# Altium PCB RasPiHAT-INPUT.PcbDoc
Units mil, origin at the board's own origin, x right, y up, seen from the top; angles counter-clockwise.
Board outline 2560 x 2205 mil, 2 copper layers (Top, Bottom), stack 61.811 mil thick; 54 components, 47 nets, 206 pads, 21 vias.
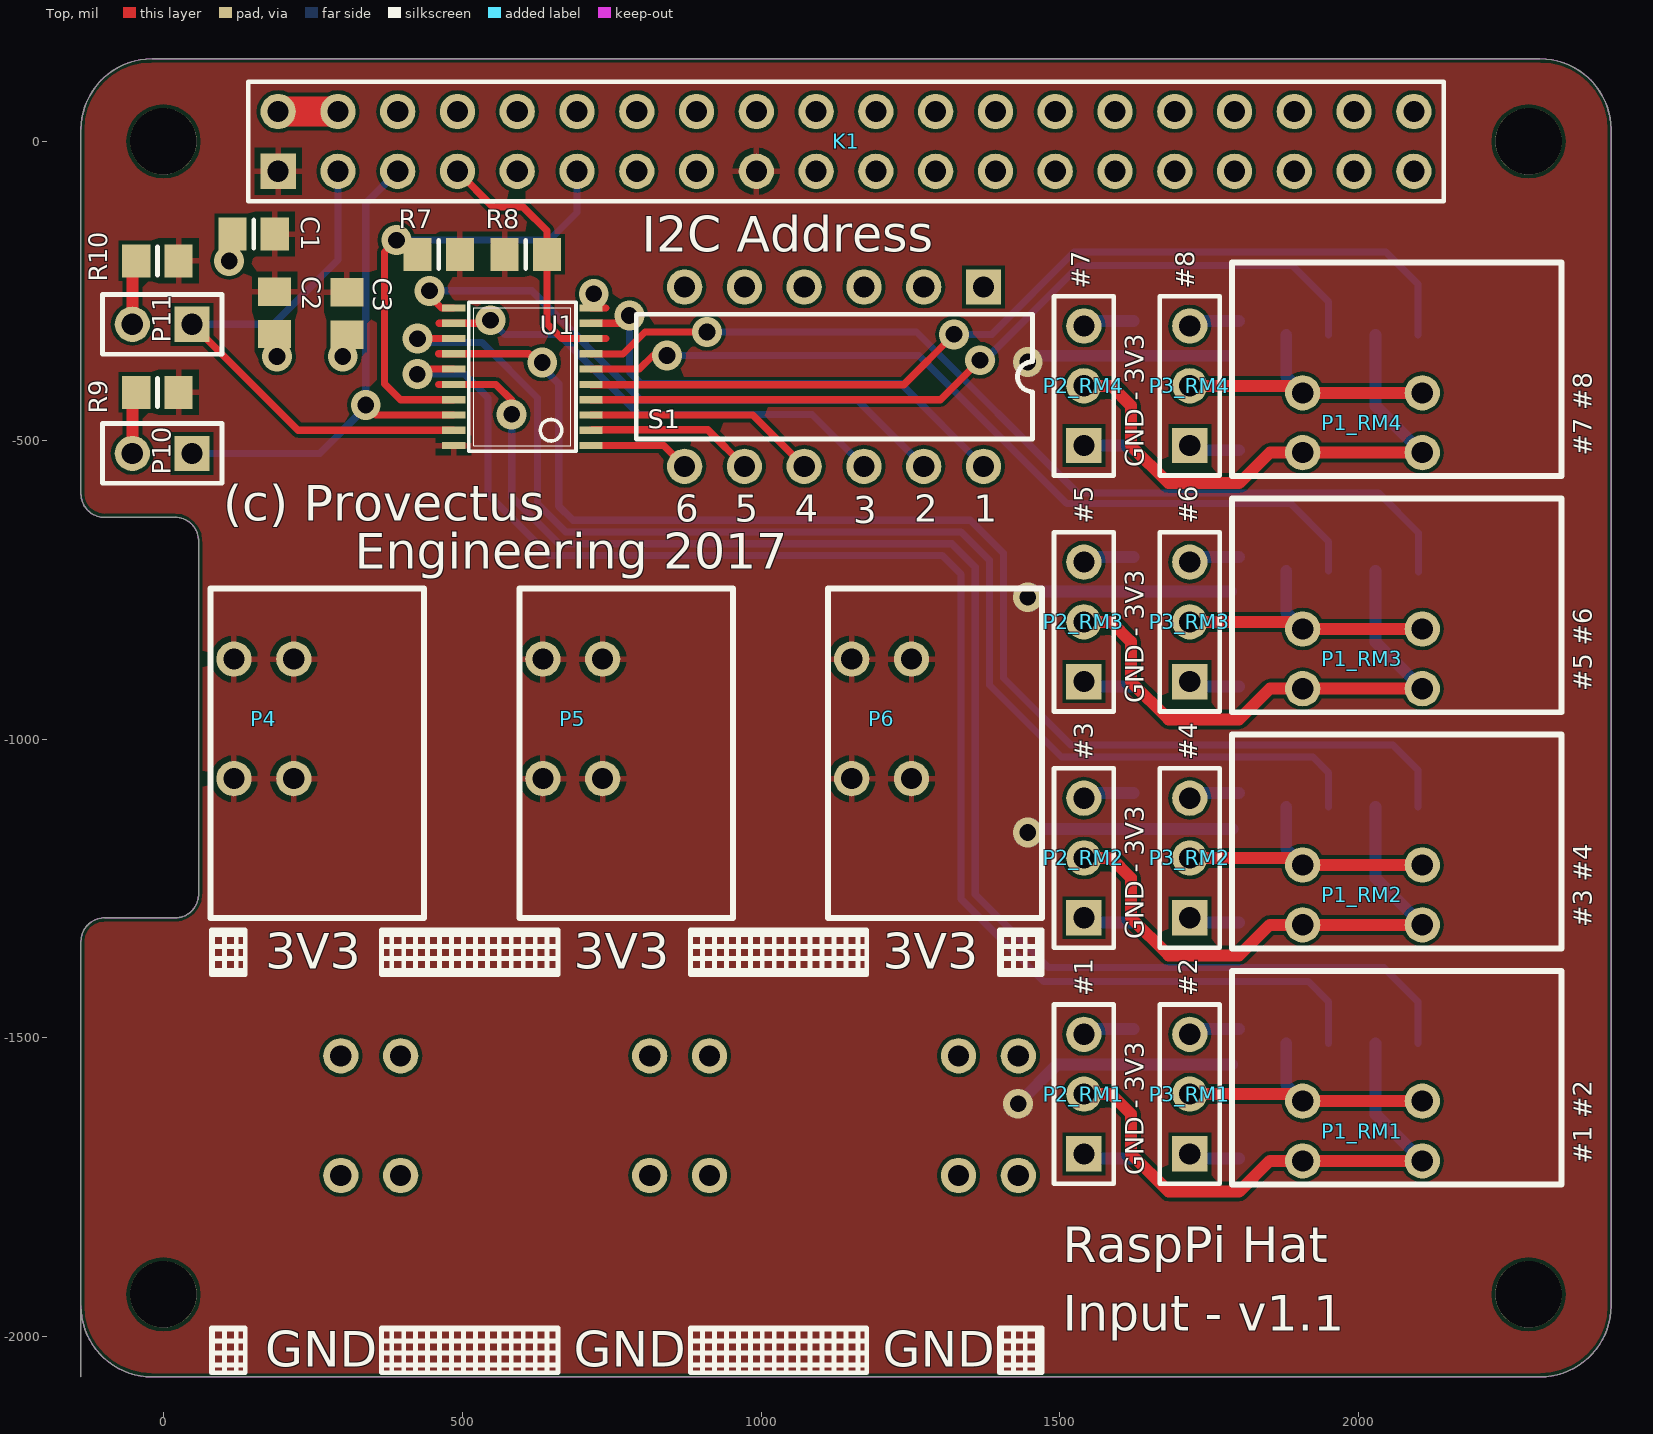
[diagram p0: Top view]
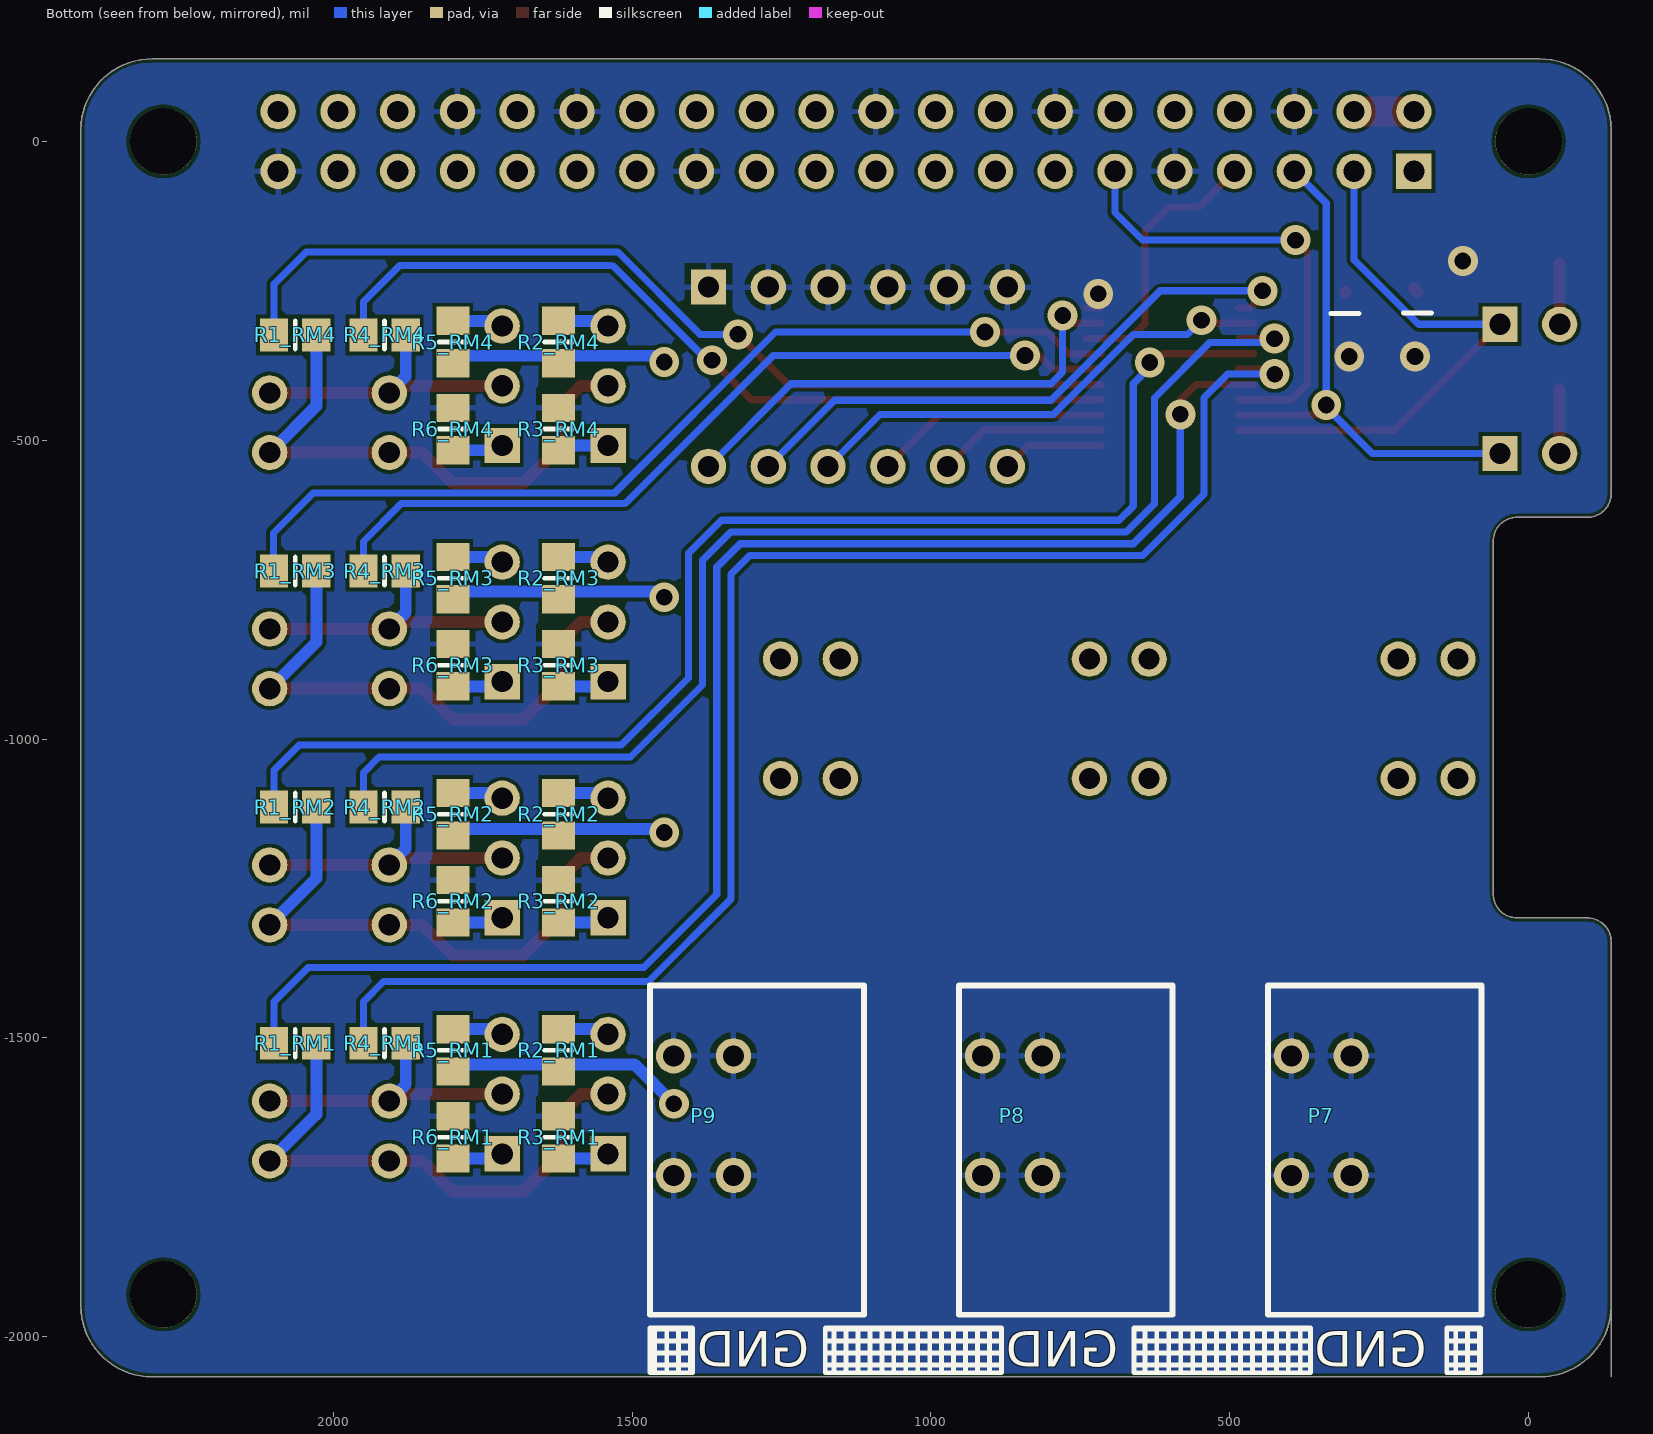
[diagram p1: Bottom view, seen from below]

## Layer stack, top to bottom
Top Solder: solder mask 0.4, Solder Resist, Dk 3.5
Top: signal copper 1.378
Dielectric 1: core 59.0551, FR-4, Dk 4.8
Bottom: signal copper 1.378
Bottom Solder: solder mask 0.4, Solder Resist, Dk 3.5

## Board outline
-138,-1948 ccw(c-19,-1948) -19,-2067 2303,-2067 ccw(c2303,-1948) 2422,-1948 2422,20 ccw(c2303.5,19.5) 2303,138 -19,138 ccw(c-19.5,19.5) -138,20 -138,-590 ccw(c-98.5,-589.5) -98,-629 20,-629 cw(c19.5,-668.5) 59,-669 59,-1259 cw(c19.5,-1259.5) 20,-1299 -98,-1299 ccw(c-98.5,-1338.5) -138,-1338 -138,-2067

## Design rules (kind name [scope] priority, off if disabled: settings)
Clearance mdViaVia [IsVia vs IsVia] p1: gap=6
Clearance mdPadVia [IsPad vs IsVia] p2: gap=6
Clearance mdPadPad [IsPad vs IsPad] p3: gap=6
Clearance mdWireVia [(InLayerClass('Signal Layers') AND IsTrack) vs IsVia] p4: gap=6
Clearance mdWirePad [(InLayerClass('Signal Layers') AND IsTrack) vs IsPad] p5: gap=6
Clearance mdWireWire [(InLayerClass('Signal Layers') AND IsTrack) vs (InLayerClass('Signal Layers') AND IsTrack)] p6: gap=6
Clearance [All] p7: gap=6
HoleSize [All] p1: absolutevalues=TRUE maxlimit=100000 minlimit=12 maxpercent=80.000 minpercent=20.000
HoleToHoleClearance [All] p1: gap=8 allowstackedmicrovias=TRUE
PolygonConnect ThermalVias [IsVia] p1: connectstyle=Direct reliefconductorwidth=10 reliefentries=4 polygonreliefangle="90 Angle" airgapwidth=10
PolygonConnect [All] p2: connectstyle=Relief reliefconductorwidth=10 reliefentries=4 polygonreliefangle="90 Angle" airgapwidth=10
RoomDefinition RM4 [InComponentClass('RM4')] p1: confinementstyle=ConfineIn formatcopy=TRUE lockcomponents=FALSE outline 2350.98,-585 2350.98,-193.9 1475,-193.9 1475,-585
RoomDefinition RM3 [InComponentClass('RM3')] p2: confinementstyle=ConfineIn formatcopy=TRUE lockcomponents=FALSE outline 2350.98,-980 2350.98,-588.9 1475,-588.9 1475,-980
RoomDefinition RM2 [InComponentClass('RM2')] p3: confinementstyle=ConfineIn formatcopy=TRUE lockcomponents=FALSE outline 2350.98,-1375 2350.98,-983.9 1475,-983.9 1475,-1375
RoomDefinition RM1 [InComponentClass('RM1')] p4: confinementstyle=ConfineIn formatcopy=TRUE lockcomponents=FALSE outline 2350.98,-1770 2350.98,-1378.9 1475,-1378.9 1475,-1770
RoomDefinition RasPiHAT-INPUT [InComponentClass('RasPiHAT-INPUT')] p5: confinementstyle=ConfineIn formatcopy=TRUE lockcomponents=FALSE outline 2460,175 -185,175 -185,-2067 2460,-2067
RoutingVias [All] p1: holewidth=28 width=50 viastyle="Through Hole" minholewidth=28 minwidth=50 maxholewidth=28 maxwidth=50
SilkToSilkClearance [All] p1 off: silktosilkclearance=10
SilkToSolderMaskClearance [IsPad] p1 off: minsilkscreentomaskgap=10 clearancetoexposedcopper=TRUE
SolderMaskExpansion [All] p1: expansion=2
Width [All] p1: maxlimit=100000 minlimit=6 preferedwidth=10
26 further rules are at their usual default settings.

## Classes and differential pairs
channel class Input: RM1 RM2 RM3 RM4
component class RM1: P1_RM1 P2_RM1 P3_RM1 R1_RM1 R2_RM1 R3_RM1 R4_RM1 R5_RM1 R6_RM1
component class RM2: P1_RM2 P2_RM2 P3_RM2 R1_RM2 R2_RM2 R3_RM2 R4_RM2 R5_RM2 R6_RM2
component class RM3: P1_RM3 P2_RM3 P3_RM3 R1_RM3 R2_RM3 R3_RM3 R4_RM3 R5_RM3 R6_RM3
component class RM4: P1_RM4 P2_RM4 P3_RM4 R1_RM4 R2_RM4 R3_RM4 R4_RM4 R5_RM4 R6_RM4
component class RasPiHAT-INPUT: C1 C2 C3 J1 K1 P4 P5 P6 P7 P8 P9 P10 P11 R7 R8 R9 R10 S1 U1

## Components (designator, comment, footprint, x,y, rotation, side; value= is the part's Value field where it differs from the comment)
C1 "Cap" 6-0805_N#1 150.94,-155 r0 top
C2 "Cap" 6-0805_N#2 186,-287 r270 top
C3 "Cap" 6-0805_N#2 307,-288 r270 top
K1 "PIN20X2" HDR2X20 192,-50 r0 top
P1_RM1 "Header 2" "2 PIN TERM BLK" 1906.1,-1705.67 r90 top (schematic designator P1)
P1_RM2 "Header 2" "2 PIN TERM BLK" 1906.1,-1310.67 r90 top (schematic designator P1)
P1_RM3 "Header 2" "2 PIN TERM BLK" 1906.1,-915.67 r90 top (schematic designator P1)
P1_RM4 "Header 2" "2 PIN TERM BLK" 1906.1,-520.67 r90 top (schematic designator P1)
P2_RM1 "Header 3" HDR1X3 1539.96,-1693.86 r90 top (schematic designator P2)
P2_RM2 "Header 3" HDR1X3 1539.96,-1298.86 r90 top (schematic designator P2)
P2_RM3 "Header 3" HDR1X3 1539.96,-903.86 r90 top (schematic designator P2)
P2_RM4 "Header 3" HDR1X3 1539.96,-508.86 r90 top (schematic designator P2)
P3_RM1 "Header 3" HDR1X3 1717.13,-1693.86 r90 top (schematic designator P3)
P3_RM2 "Header 3" HDR1X3 1717.13,-1298.86 r90 top (schematic designator P3)
P3_RM3 "Header 3" HDR1X3 1717.13,-903.86 r90 top (schematic designator P3)
P3_RM4 "Header 3" HDR1X3 1717.13,-508.86 r90 top (schematic designator P3)
P4 "Header 2" "2 PIN TERM BLK" 118.11,-866.14 r0 top
P5 "Header 2" "2 PIN TERM BLK" 634.84,-866.14 r0 top
P6 "Header 2" "2 PIN TERM BLK" 1151.57,-866.14 r0 top
P7 "Header 2" "2 PIN TERM BLK" 396.85,-1529.96 r180 bottom
P8 "Header 2" "2 PIN TERM BLK" 913.58,-1529.96 r180 bottom
P9 "Header 2" "2 PIN TERM BLK" 1430.31,-1529.96 r180 bottom
P10 "Header 2" HDR1X2 48,-522 r180 top
P11 "Header 2" HDR1X2 48,-306 r180 top
R1_RM1 "Res1" 6-0805_N#1 2063.58,-1508.82 r180 bottom (schematic designator R1)
R1_RM2 "Res1" 6-0805_N#1 2063.58,-1113.82 r180 bottom (schematic designator R1)
R1_RM3 "Res1" 6-0805_N#1 2063.58,-718.82 r180 bottom (schematic designator R1)
R1_RM4 "Res1" 6-0805_N#1 2063.58,-323.82 r180 bottom (schematic designator R1)
R2_RM1 "Res1" 6-0805_N#1 1622.64,-1520.63 r90 bottom (schematic designator R2)
R2_RM2 "Res1" 6-0805_N#1 1622.64,-1125.63 r90 bottom (schematic designator R2)
R2_RM3 "Res1" 6-0805_N#1 1622.64,-730.63 r90 bottom (schematic designator R2)
R2_RM4 "Res1" 6-0805_N#1 1622.64,-335.63 r90 bottom (schematic designator R2)
R3_RM1 "Res1" 6-0805_N#1 1622.64,-1666.3 r90 bottom (schematic designator R3)
R3_RM2 "Res1" 6-0805_N#1 1622.64,-1271.3 r90 bottom (schematic designator R3)
R3_RM3 "Res1" 6-0805_N#1 1622.64,-876.3 r90 bottom (schematic designator R3)
R3_RM4 "Res1" 6-0805_N#1 1622.64,-481.3 r90 bottom (schematic designator R3)
R4_RM1 "Res1" 6-0805_N#1 1913.98,-1508.82 r180 bottom (schematic designator R4)
R4_RM2 "Res1" 6-0805_N#1 1913.98,-1113.82 r180 bottom (schematic designator R4)
R4_RM3 "Res1" 6-0805_N#1 1913.98,-718.82 r180 bottom (schematic designator R4)
R4_RM4 "Res1" 6-0805_N#1 1913.98,-323.82 r180 bottom (schematic designator R4)
R5_RM1 "Res1" 6-0805_N#1 1799.8,-1520.63 r90 bottom (schematic designator R5)
R5_RM2 "Res1" 6-0805_N#1 1799.8,-1125.63 r90 bottom (schematic designator R5)
R5_RM3 "Res1" 6-0805_N#1 1799.8,-730.63 r90 bottom (schematic designator R5)
R5_RM4 "Res1" 6-0805_N#1 1799.8,-335.63 r90 bottom (schematic designator R5)
R6_RM1 "Res1" 6-0805_N#1 1799.8,-1666.3 r90 bottom (schematic designator R6)
R6_RM2 "Res1" 6-0805_N#1 1799.8,-1271.3 r90 bottom (schematic designator R6)
R6_RM3 "Res1" 6-0805_N#1 1799.8,-876.3 r90 bottom (schematic designator R6)
R6_RM4 "Res1" 6-0805_N#1 1799.8,-481.3 r90 bottom (schematic designator R6)
R7 "Res1" 6-0805_N#1 460.63,-188.98 r180 top
R8 "Res1" 6-0805_N#1 606.3,-188.98 r0 top
R9 "Res1" 6-0805_N#1 -10,-420 r180 top
R10 "Res1" 6-0805_N#1 -10,-200 r180 top
S1 "SW DIP-6" DIP-12/SW 1122.05,-393.7 r180 top
U1 "PCA9501" TSSOP20 600.39,-393.7 r90 top

## Footprints (in the part's own frame and the unit in brackets; to place one, negate y for a bottom-side part, rotate by r counter-clockwise, add the part's x,y. Pads: shape width x height; smd on the part's side, far side on the other; paste and mask are expansions set on the pad)
"2 PIN TERM BLK" [mm] "2 Poles/2 Pin 2.54mm/0.1\" PCB Universal Screw Terminal Block Connector"
  round 1.5 hole 0.9: 1(0,0) 1(0,-5.08) 2(2.54,0) 2(2.54,-5.08)
  silkscreen extent -1,-11 8.08,3, body extent -1,-11 8,3, height 8
6-0805_N#1 [mm] "Chip Resistor, Body 2.0x1.2mm, IPC Medium Density"
  rect 1.2x1.4 smd: 1(-0.9,0) 2(0.9,0)
  silkscreen extent 0,-0.6 0,0.6, body extent -1.07,-0.7 1.07,0.7, height 0.7
6-0805_N#2 [mm] "Chip Resistor, Body 2.0x1.2mm, IPC Medium Density"
  rect 1.2x1.4 smd: 1(0.9,0) 2(-0.9,0)
  body extent -1.07,-0.7 1.07,0.7, height 0.7
DIP-12/SW [mm] "DIP Switch; 12 Leads"
  rect 1.5x1.5 hole 0.9: 1(-6.35,-3.81)
  round 1.5 hole 0.9: 2(-3.81,-3.81) 3(-1.27,-3.81) 4(1.27,-3.81) 5(3.81,-3.81) 6(6.35,-3.81) 7(6.35,3.81) 8(3.81,3.81) 9(1.27,3.81) 10(-1.27,3.81) 11(-3.81,3.81) 12(-6.35,3.81)
  silkscreen extent -8.43,-2.65 8.41,2.65
HDR1X2 [mm] "Connector; Header; 2 Position"
  rect 1.5x1.5 hole 0.9: 1(0,0)
  round 1.5 hole 0.9: 2(2.54,0)
  silkscreen extent -1.27,-1.27 3.81,1.27
HDR1X3 [mm] "Connector; Header; 3 Position"
  rect 1.5x1.5 hole 0.9: 1(0,0)
  round 1.5 hole 0.9: 2(2.54,0) 3(5.08,0)
  silkscreen extent -1.27,-1.27 6.35,1.27
HDR2X20 [mm] "Connector; Header; 20x2 Position"
  rect 1.5x1.5 hole 0.9: 1(0,0)
  round 1.5 hole 0.9: 2(0,2.54) 3(2.54,0) 4(2.54,2.54) 5(5.08,0) 6(5.08,2.54) 7(7.62,0) 8(7.62,2.54) 9(10.16,0) 10(10.16,2.54) 11(12.7,0) 12(12.7,2.54) 13(15.24,0) 14(15.24,2.54) 15(17.78,0) 16(17.78,2.54) 17(20.32,0) 18(20.32,2.54) 19(22.86,0) 20(22.86,2.54) 21(25.4,0) 22(25.4,2.54) 23(27.94,0) 24(27.94,2.54) 25(30.48,0) 26(30.48,2.54) 27(33.02,0) 28(33.02,2.54) 29(35.56,0) 30(35.56,2.54) 31(38.1,0) 32(38.1,2.54) 33(40.64,0) 34(40.64,2.54) 35(43.18,0) 36(43.18,2.54) 37(45.72,0) 38(45.72,2.54) 39(48.26,0) 40(48.26,2.54)
  silkscreen extent -1.27,-1.27 49.53,3.81
TSSOP20 [mil]
  rect 12x39 smd paste-1000 mask-1000: 1(-115.16,-114.87) 2(-89.57,-114.87) 3(-63.98,-114.87) 4(-38.39,-114.87) 5(-12.8,-114.87) 6(12.8,-114.87) 7(38.39,-114.87) 8(63.98,-114.87) 9(89.57,-114.87) 10(115.16,-114.87) 11(115.16,114.87) 12(89.57,114.87) 13(63.98,114.87) 14(38.39,114.87) 15(12.8,114.87) 16(-12.8,114.87) 17(-38.39,114.87) 18(-63.98,114.87) 19(-89.57,114.87) 20(-115.16,114.87)
  silkscreen extent -125,-90 125,90

## Part data
C1 C2 C3: "Capacitor"
P1_RM1 P1_RM2 P1_RM3 P1_RM4 P4 P5 P6 P7 P8 P9 P10 P11: "Header, 2-Pin"
P2_RM1 P2_RM2 P2_RM3 P2_RM4 P3_RM1 P3_RM2 P3_RM3 P3_RM4: "Header, 3-Pin"
R1_RM1 R1_RM2 R1_RM3 R1_RM4 R2_RM1 R2_RM2 R2_RM3 R2_RM4 R3_RM1 R3_RM2 R3_RM3 R3_RM4 R4_RM1 R4_RM2 R4_RM3 R4_RM4 R5_RM1 R5_RM2 R5_RM3 R5_RM4 R6_RM1 R6_RM2 R6_RM3 R6_RM4 R7 R8 R9 R10: "Resistor"
S1: "DIP Switch, 6 Position, SPST"

## Free pads (board coordinates)
  round 111 hole 111: 1(0,-1929) 1(0,0) 1(2284,-1929) 1(2284,0)

## Via types
v1: diameter 50, hole 28, Top to Bottom, 21 vias

## Nets (pads, with @x,y where several pads share a name; then routed paths per layer and width w, separated by ;. In a path a pad name is that pad's centre, name@x,y a point inside that pad or via, vN(x,y) a via of type N, cw(c..) or ccw(c..) an arc to the next point about the centre after c; other vN are vias at no path point)
+3V3: C1.2 C2.2 C3.2 K1.1 K1.17 P4.1 P4.2 P5.1 P5.2 P6.1 P6.2 R2_RM1.1 R2_RM2.1 R2_RM3.1 R2_RM4.1 R5_RM1.1 R5_RM2.1 R5_RM3.1 R5_RM4.1 R7.1 R8.1 R9.1 R10.1 U1.20 | length 1424.4
  Top w20: C2.2 C2.2@192,-245.57 ; C3.2@306,-251.57 C3.2
  Bottom w20: v1(1430,-1610) 1495.65,-1544.35 R5_RM1.1@1788.09,-1544.35 ; v1(1446.08,-1156.28) 1452.32,-1150.05 R5_RM2.1@1788.79,-1150.05 ; v1(1446.08,-762.58) 1455.91,-752.75 R5_RM3.1@1786.49,-752.75 ; v1(1446.08,-368.88) 1456.37,-358.59 R5_RM4.1@1781.23,-358.59
+5V: K1.2 K1.4 | length 100
  Top w50: K1.2 K1.4
EEPROM_WC: K1.11 R7.2 U1.17 | length 765.2
  Top w12: v1(390,-165.2) 370.08,-185.12 370.08,-405.51 396.65,-432.09 U1.17
  Bottom w12: v1(390,-165.2) 645.83,-165.2 692,-119.02 K1.11
GND: C1.1 C2.1 C3.1 K1.6 K1.9 K1.14 K1.20 K1.25 K1.30 K1.34 K1.39 P7.1 P7.2 P8.1 P8.2 P9.1 P9.2 R3_RM1.2 R3_RM2.2 R3_RM3.2 R3_RM4.2 R6_RM1.2 R6_RM2.2 R6_RM3.2 R6_RM4.2 S1.1 S1.2 S1.3 S1.4 S1.5 S1.6 U1.10 | length 24.7
  Top w12: U1.10 740,-278.54
  other v1: 190,-360 300,-360 720,-255 110,-200
INTERRUPT: K1.7 R8.2 U1.8 | length 455
  Top w12: K1.7 552,-110 602.13,-110 641.73,-149.61 R8.2 641.73,-305.12 666.34,-329.72 U1.8 740,-329.72
NetP1_RM1_1: P1_RM1.1 P2_RM1.2 R1_RM1.2 | length 923.2
  Top w20: P2_RM1.2 1585.63,-1593.86 1618.7,-1626.93 1618.7,-1693.86 1681.69,-1756.85 1799.8,-1756.85 1850.98,-1705.67 1906.1,-1705.67 P1_RM1.1@2106.1,-1705.67
  Bottom w20: R1_RM1.2 2028.15,-1627.72 P1_RM1.1@2106.1,-1705.67
NetP1_RM1_2: P1_RM1.2 P3_RM1.2 R4_RM1.2 | length 502.1
  Top w20: P3_RM1.2 1894.29,-1593.86 1906.1,-1605.67 P1_RM1.2@2106.1,-1605.67
  Bottom w20: R4_RM1.2 1878.54,-1578.11 P1_RM1.2@1906.1,-1605.67
NetP1_RM2_1: P1_RM2.1 P2_RM2.2 R1_RM2.2 | length 923.2
  Top w20: P2_RM2.2 1585.63,-1198.86 1618.7,-1231.93 1618.7,-1298.86 1681.69,-1361.85 1799.8,-1361.85 1850.98,-1310.67 1906.1,-1310.67 P1_RM2.1@2106.1,-1310.67
  Bottom w20: R1_RM2.2 2028.15,-1232.72 P1_RM2.1@2106.1,-1310.67
NetP1_RM2_2: P1_RM2.2 P3_RM2.2 R4_RM2.2 | length 502.1
  Top w20: P3_RM2.2 1894.29,-1198.86 1906.1,-1210.67 P1_RM2.2@2106.1,-1210.67
  Bottom w20: R4_RM2.2 1878.54,-1183.11 P1_RM2.2@1906.1,-1210.67
NetP1_RM3_1: P1_RM3.1 P2_RM3.2 R1_RM3.2 | length 923.2
  Top w20: P2_RM3.2 1585.63,-803.86 1618.7,-836.93 1618.7,-903.86 1681.69,-966.85 1799.8,-966.85 1850.98,-915.67 1906.1,-915.67 P1_RM3.1@2106.1,-915.67
  Bottom w20: R1_RM3.2 2028.15,-837.72 P1_RM3.1@2106.1,-915.67
NetP1_RM3_2: P1_RM3.2 P3_RM3.2 R4_RM3.2 | length 502.1
  Top w20: P3_RM3.2 1894.29,-803.86 1906.1,-815.67 P1_RM3.2@2106.1,-815.67
  Bottom w20: R4_RM3.2 1878.54,-788.11 P1_RM3.2@1906.1,-815.67
NetP1_RM4_1: P1_RM4.1 P2_RM4.2 R1_RM4.2 | length 923.2
  Top w20: P2_RM4.2 1585.63,-408.86 1618.7,-441.93 1618.7,-508.86 1681.69,-571.85 1799.8,-571.85 1850.98,-520.67 1906.1,-520.67 P1_RM4.1@2106.1,-520.67
  Bottom w20: R1_RM4.2 2028.15,-442.72 P1_RM4.1@2106.1,-520.67
NetP1_RM4_2: P1_RM4.2 P3_RM4.2 R4_RM4.2 | length 502.1
  Top w20: P3_RM4.2 1894.29,-408.86 1906.1,-420.67 P1_RM4.2@2106.1,-420.67
  Bottom w20: R4_RM4.2 1878.54,-393.11 P1_RM4.2@1906.1,-420.67
NetP2_RM1_1: P2_RM1.1 R3_RM1.1 | length 85.9
  Bottom w20: P2_RM1.1 1547.83,-1701.73 R3_RM1.1
NetP2_RM1_3: P2_RM1.3 R2_RM1.2 | length 86.3
  Bottom w20: P2_RM1.3 1548.62,-1485.2 R2_RM1.2
NetP2_RM2_1: P2_RM2.1 R3_RM2.1 | length 85.9
  Bottom w20: P2_RM2.1 1547.83,-1306.73 R3_RM2.1
NetP2_RM2_3: P2_RM2.3 R2_RM2.2 | length 86.3
  Bottom w20: P2_RM2.3 1548.62,-1090.2 R2_RM2.2
NetP2_RM3_1: P2_RM3.1 R3_RM3.1 | length 85.9
  Bottom w20: P2_RM3.1 1547.83,-911.73 R3_RM3.1
NetP2_RM3_3: P2_RM3.3 R2_RM3.2 | length 86.3
  Bottom w20: P2_RM3.3 1548.62,-695.2 R2_RM3.2
NetP2_RM4_1: P2_RM4.1 R3_RM4.1 | length 97.1
  Bottom w20: P2_RM4.1@1547.83,-516.73 P2_RM4.1 1614.76,-508.86 R3_RM4.1
NetP2_RM4_3: P2_RM4.3 R2_RM4.2 | length 86.3
  Bottom w20: P2_RM4.3 1548.62,-300.2 R2_RM4.2
NetP3_RM1_1: P3_RM1.1 R6_RM1.1 | length 85.9
  Bottom w20: P3_RM1.1 1725,-1701.73 R6_RM1.1
NetP3_RM1_3: P3_RM1.3 R5_RM1.2 | length 86.3
  Bottom w20: P3_RM1.3 1725.79,-1485.2 R5_RM1.2
NetP3_RM2_1: P3_RM2.1 R6_RM2.1 | length 85.9
  Bottom w20: P3_RM2.1 1725,-1306.73 R6_RM2.1
NetP3_RM2_3: P3_RM2.3 R5_RM2.2 | length 86.3
  Bottom w20: P3_RM2.3 1725.79,-1090.2 R5_RM2.2
NetP3_RM3_1: P3_RM3.1 R6_RM3.1 | length 85.9
  Bottom w20: P3_RM3.1 1725,-911.73 R6_RM3.1
NetP3_RM3_3: P3_RM3.3 R5_RM3.2 | length 86.3
  Bottom w20: P3_RM3.3 1725.79,-695.2 R5_RM3.2
NetP3_RM4_1: P3_RM4.1 R6_RM4.1 | length 85.9
  Bottom w20: P3_RM4.1 1725,-516.73 R6_RM4.1
NetP3_RM4_3: P3_RM4.3 R5_RM4.2 | length 86.3
  Bottom w20: P3_RM4.3 1725.79,-300.2 R5_RM4.2
NetP10_2: P10.2 R9.2 | length 107.2
  Top w20: P10.2 -51.43,-521.43 R9.2@-51.43,-415
NetP11_2: P11.2 R10.2 | length 102.2
  Top w20: P11.2 -51.43,-305.43 R10.2@-51.43,-204
NetR1_RM1_1: R1_RM1.1 U1.16 | length 2551.5
  Top w12: 460,-406.5 U1.16 556.1,-406.5 582.68,-433.07 v1(582.68,-456.69)
  Bottom w12: v1(582.68,-456.69) 582.68,-594.49 661.42,-673.23 1318.9,-673.23 1358.27,-712.6 1358.27,-1259.84 1480.32,-1381.89 2041.61,-1381.89 2099.02,-1439.29 R1_RM1.1
NetR1_RM2_1: R1_RM2.1 U1.14 | length 2235.8
  Top w12: 460.32,-355.32 U1.14 611.22,-355.32 625.98,-370.08 v1(633.86,-370.08)
  Bottom w12: v1(633.86,-370.08) 633.86,-377.95 661.42,-405.51 661.42,-610.24 685.04,-633.86 1350.39,-633.86 1405.51,-688.98 1405.51,-897.64 1517.87,-1010 2056.85,-1010 2099.02,-1052.17 R1_RM2.1
NetR1_RM3_1: R1_RM3.1 U1.7 | length 1604.4
  Top w12: U1.7 715.85,-355.9 768.94,-355.9 805.94,-318.9 v1(909.45,-318.9)
  Bottom w12: v1(909.45,-318.9) 1259.84,-318.9 1528.93,-587.98 2032.87,-587.98 2100,-655.12 R1_RM3.1@2100,-720
NetR1_RM4_1: R1_RM4.1 U1.5 | length 1583.2
  Top w12: U1.5 715.85,-407.08 1238.59,-407.08 v1(1322.83,-322.83)
  Bottom w12: v1(1322.83,-322.83) 1385.83,-322.83 1523.66,-185 2045,-185 2099.02,-239.02 R1_RM4.1
NetR4_RM1_1: R4_RM1.1 U1.15 | length 2506.1
  Top w12: v1(424.8,-389.37) 433.47,-389.37 441.93,-380.91 U1.15
  Bottom w12: v1(424.8,-389.37) 503.54,-389.37 507.87,-393.7 543.31,-429.13 543.31,-590.55 645.67,-692.91 1303.15,-692.91 1334.65,-724.41 1334.65,-1267.72 1472.44,-1405.51 1915.63,-1405.51 1949.41,-1439.29 R4_RM1.1
NetR4_RM2_1: R4_RM2.1 U1.13 | length 2167.7
  Top w12: v1(425,-330) U1.13@483.83,-330
  Bottom w12: v1(425,-330) 431.21,-336.21 533.06,-336.21 625.98,-429.13 625.98,-606.3 673.23,-653.54 1334.65,-653.54 1381.89,-700.79 1381.89,-909.45 1502.44,-1030 1923.31,-1030 1949.41,-1056.1 R4_RM2.1
NetR4_RM3_1: R4_RM3.1 U1.6 | length 1421.8
  Top w12: U1.6 796.26,-380.91 818.9,-358.27 v1(842.52,-358.27)
  Bottom w12: v1(842.52,-358.27) 1263.78,-358.27 1511.5,-605.98 1885.98,-605.98 1949.41,-669.41 R4_RM3.1
NetR4_RM4_1: R4_RM4.1 U1.4 | length 1442.7
  Top w12: U1.4 1300.2,-432.09 1372.05,-360.24 1377.95,-366.14 v1(1366.14,-366.14)
  Bottom w12: v1(1366.14,-366.14) 1385.83,-366.14 1379.92,-360.24 1531.5,-208.66 ; 1536.46,-207.52 1833.11,-207.52 1888.62,-207.52 1949.41,-268.31 R4_RM4.1
NetS1_7: S1.7 U1.1 | length 171.2
  Top w12: U1.1 837.2,-508.86 S1.7
NetS1_8: S1.8 U1.2 | length 282.6
  Top w12: U1.2 716.25,-482.28 910.63,-482.28 S1.8
NetS1_9: S1.9 U1.3 | length 392.4
  Top w12: U1.3 986.02,-457.68 S1.9
NetS1_10: S1.10 U1.12 | length 814.5
  Top w12: 460.87,-304.13 U1.12 542.32,-304.13 v1(547.24,-299.21)
  Bottom w12: v1(547.24,-299.21) 570.87,-322.83 661.42,-322.83 795.28,-456.69 1085.04,-456.69 S1.10
NetS1_11: S1.11 U1.11 | length 1005.9
  Top w12: v1(445,-250) 445,-258.34 465.21,-278.54 U1.11
  Bottom w12: v1(445,-250) 616.14,-250 799.21,-433.07 1161.42,-433.07 S1.11
NetS1_12: S1.12 U1.9 | length 822
  Top w12: U1.9 766.73,-304.13 v1(779.53,-291.34)
  Bottom w12: v1(779.53,-291.34) 779.53,-385.83 799.21,-405.51 1233.86,-405.51 S1.12
SCL: K1.5 P10.1 U1.18 | length 893.4
  Top w12: v1(338.58,-440.94) 355.32,-457.68 U1.18
  Bottom w12: P10.1 261.46,-522 338.58,-444.88 338.58,-103.42 K1.5
SDA: K1.3 P11.1 U1.19 | length 947.7
  Top w12: P11.1 225.27,-483.27 U1.19
  Bottom w12: P11.1 184,-306 292,-198 K1.3
pads on no net: K1.8 K1.10 K1.12 K1.13 K1.15 K1.16 K1.18 K1.19 K1.21 K1.22 K1.23 K1.24 K1.26 K1.27 K1.28 K1.29 K1.31 K1.32 K1.33 K1.35 K1.36 K1.37 K1.38 K1.40

## Polygon pours and split planes (outlines as drawn)
GND on Bottom "Bottom-No Net" (solid, remove dead copper, pour order 4): -150,150 2450,150 2450,-2100 -150,-2100
+3V3 on Top "Bottom-No Net" (solid, remove dead copper, pour order 8): -150,150 2450,150 2450,-2100 -150,-2100
no net on Top Overlay "Bottom-No Net 1" (hatched 90Degree grid 20 track 8): 365,-1985 660,-1985 660,-2060 365,-2060
no net on Top Overlay "Bottom-No Net 1" (hatched 90Degree grid 20 track 8): 881.73,-1985 1176.73,-1985 1176.73,-2060 881.73,-2060
no net on Top Overlay "Bottom-No Net 1" (hatched 90Degree grid 20 track 8): 1398.46,-1985 1470,-1985 1470,-2060 1398.46,-2060
no net on Top Overlay "Bottom-No Net 1" (hatched 90Degree grid 20 track 8): 80,-1985.04 136.89,-1985.04 136.89,-2060.04 80,-2060.04
no net on Top Overlay "Bottom-No Net 1" (hatched 90Degree grid 20 track 8): 365,-1319.18 660,-1319.18 660,-1394.18 365,-1394.18
no net on Top Overlay "Bottom-No Net 1" (hatched 90Degree grid 20 track 8): 881.73,-1319.18 1176.73,-1319.18 1176.73,-1394.18 881.73,-1394.18
no net on Top Overlay "Bottom-No Net 1" (hatched 90Degree grid 20 track 8): 1398.46,-1319.18 1470,-1319.18 1470,-1394.18 1398.46,-1394.18
no net on Top Overlay "Bottom-No Net 1" (hatched 90Degree grid 20 track 8): 80,-1319.22 136.89,-1319.22 136.89,-1394.22 80,-1394.22
no net on Bottom Overlay "Bottom-No Net 1" (hatched 90Degree grid 20 track 8): 365,-1985 660,-1985 660,-2060 365,-2060
no net on Bottom Overlay "Bottom-No Net 1" (hatched 90Degree grid 20 track 8): 881.73,-1985 1176.73,-1985 1176.73,-2060 881.73,-2060
no net on Bottom Overlay "Bottom-No Net 1" (hatched 90Degree grid 20 track 8): 1398.46,-1985 1470,-1985 1470,-2060 1398.46,-2060
no net on Bottom Overlay "Bottom-No Net 1" (hatched 90Degree grid 20 track 8): 80,-1985.04 136.89,-1985.04 136.89,-2060.04 80,-2060.04

## Keep-outs
Keep-Out Layer:
  lines w0: -138,-1948 ccw(c-19,-1948) -19,-2067 2303,-2067 ccw(c2303,-1948) 2422,-1948 2422,20 ccw(c2303.5,19.5) 2303,138 -19,138 ccw(c-19.5,19.5) -138,20 -138,-590 ccw(c-98.5,-589.5) -98,-629 20,-629 cw(c19.5,-668.5) 59,-669 59,-1259 cw(c19.5,-1259.5) 20,-1299 -98,-1299 ccw(c-98.5,-1338.5) -138,-1338 -138,-1948

## Silkscreen, mask and mechanical layers (free items; w line width, h text height)
Top Overlay:
  text "I2C Address" at 800,-185 h60
  text "#7" at 1550.04,-246.14 h31 r90
  text "#8" at 1725.04,-246.14 h31 r90
  text "#7 #8" at 2390,-526.14 h31 r90
  text "GND - 3V3" at 1640,-545 h31 r90
  text "(c) Provectus" at 100,-635 h60
  text "6" at 856.05,-636.7 h45
  text "5" at 956.05,-636.7 h45
  text "4" at 1056.05,-636.7 h45
  text "2" at 1256.05,-636.7 h45
  text "1" at 1356.05,-636.7 h45
  text "3" at 1154.05,-638.7 h45
  text "#5" at 1555,-640 h31 r90
  text "#6" at 1730,-640 h31 r90
  text "Engineering 2017" at 320,-715 h60
  text "#5 #6" at 2390,-920 h31 r90
  text "GND - 3V3" at 1640,-940 h31 r90
  text "#3" at 1555,-1035 h31 r90
  text "#4" at 1730,-1035 h31 r90
  text "#3 #4" at 2390,-1315 h31 r90
  text "GND - 3V3" at 1640,-1335 h31 r90
  text "3V3" at 170,-1384.18 h60
  text "3V3" at 686.73,-1384.18 h60
  text "3V3" at 1203.46,-1384.18 h60
  text "#1" at 1555,-1430 h31 r90
  text "#2" at 1730,-1430 h31 r90
  text "#1 #2" at 2390,-1710 h31 r90
  text "GND - 3V3" at 1640,-1730 h31 r90
  text "RaspPi Hat" at 1505,-1875 h60
  text "Input - v1.1" at 1505,-1990 h60
  text "GND" at 170,-2050 h60
  text "GND" at 686.73,-2050 h60
  text "GND" at 1203.46,-2050 h60
Bottom Overlay:
  text "GND" at 170,-2050 h60
  text "GND" at 686.73,-2050 h60
  text "GND" at 1203.46,-2050 h60
Dimension:
  lines w0: 59,-1259.51 59,-669 ccw(c19.5,-668.5) 20,-629 -98,-629 cw(c-98.5,-589.5) -138,-590 -138,20 cw(c-19.5,19.5) -19,138 2303,138 cw(c2303.5,19.5) 2422,20 2422,-1948 cw(c2303,-1948) 2303,-2067 -19,-2067 cw(c-19,-1948) -138,-1948 -138,-1338 cw(c-98.5,-1338.5) -98,-1299 20,-1299 ccw(c19.5,-1259.5) 59,-1259
tRestrict:
  circle w123: c2284,-1929 r62
  circle w123: c0,0 r62
  circle w123: c2284,0 r62
  circle w123: c0,-1929 r62
bRestrict:
  circle w123: c2284,-1929 r62
  circle w123: c0,-1929 r62
  circle w123: c0,0 r62
  circle w123: c2284,0 r62
Unrouted:
  lines w0: 192,-50 992,-50 2036,-675 2304,-412 ; 192,50 292,50 ; 1492,-50 2036,-525 ; 1492,50 2036,-575 ; 1835.2,-895.83 1841.2,-733.83 ; 1865.2,-770.83 2039.2,-879.83 ; 1871.2,-658.83 1939.2,-770.83 2063.2,-770.83 ; 2022.26,-532.68 2216.26,-369.68 ; 2022.26,-482.68 2216.26,-269.68 ; 2290.26,-369.68 2290.26,-269.68